# Altium PCB PCB2.PcbDoc (part 2 of 2)
Units mm, origin at the board's own origin, x right, y up, seen from the top; angles counter-clockwise.
Board outline 247 x 102 mm, 2 copper layers (Top Layer, Bottom Layer); 194 components, 192 nets, 825 pads, 179 vias.
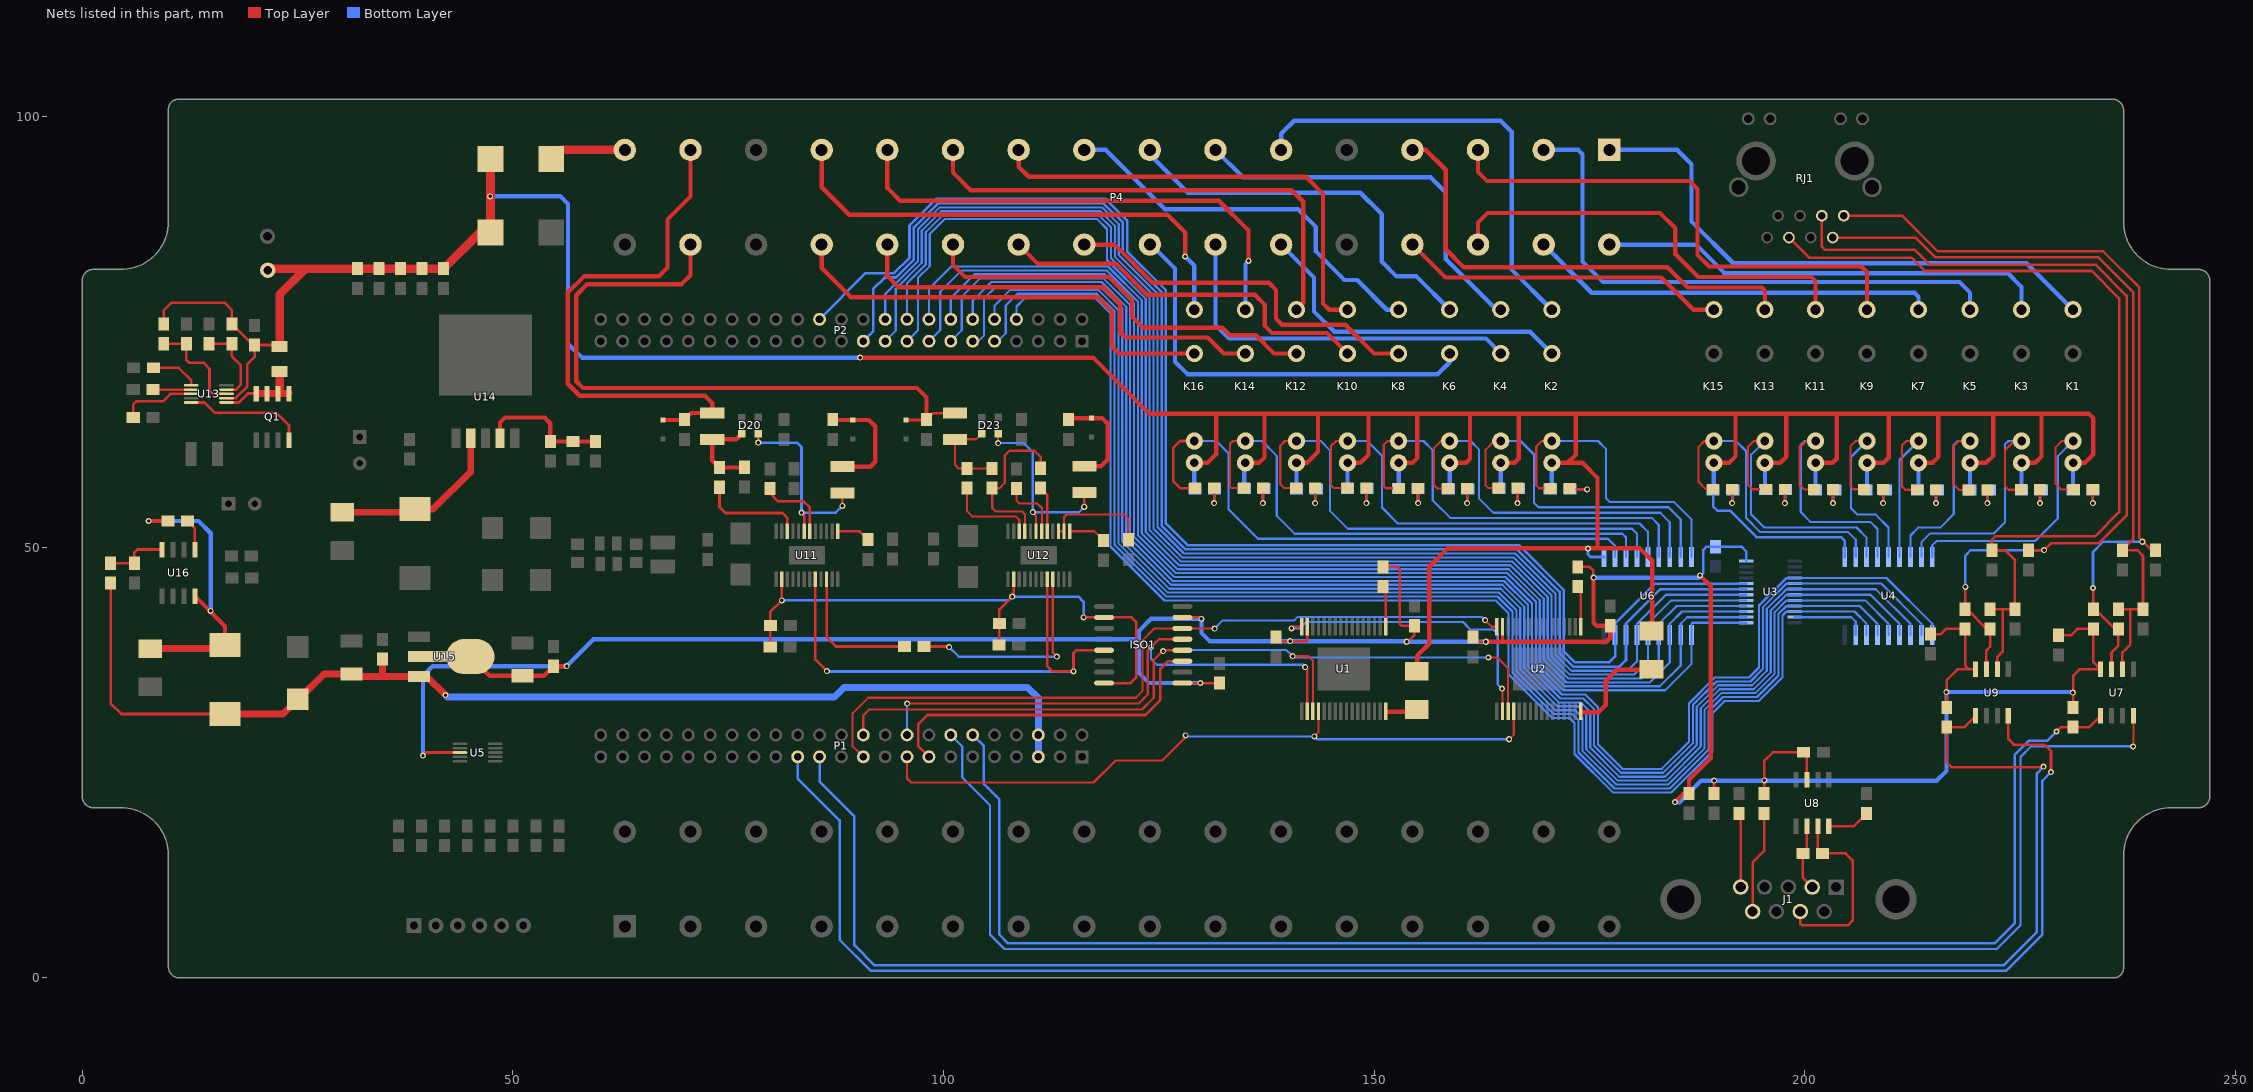
[diagram p2: the nets of this part, all layers, seen from the top]

## Via types
v1: diameter 0.7, hole 0.4, Top Layer to Bottom Layer, 179 vias

## Nets (pads, with @x,y where several pads share a name; then routed paths per layer and width w, separated by ;. In a path a pad name is that pad's centre, name@x,y a point inside that pad or via, vN(x,y) a via of type N, cw(c..) or ccw(c..) an arc to the next point about the centre after c; other vN are vias at no path point) (continued)
NetC25_1: C25.1 U11.18 | length 8.6
  Top Layer w0.3: C25.1@79.82,56.8 79.82,56.27 80.78,55.31 83.735,55.31 84.465,54.58 U11.18@84.465,51.846
NetC26_1: C26.1 D22.1 R40.2 | length 13.4
  Top Layer w0.5: C26.1@87.13,64.81 87.17,64.77 D22.1@89.45,64.77 91.32,64.77 92.06,64.03 92.06,59.92 91.484,59.344 R40.2@88.25,59.344
NetC33_1: C33.1 R42.1 U12.21 | length 19.3
  Top Layer w0.254: U12.21@109.435,51.846 109.435,53.825 109.12,54.14 106.04,54.14 105.64,54.54 R42.1@105.64,56.85 106.49,56.85 107.11,57.47 107.11,60.65 107.65,61.19 110.55,61.19 111.27,60.47 C33.1@111.27,59.17
NetC33_2: C33.2 U12.17 | length 5.4
  Top Layer w0.254: C33.2@111.27,56.884 112.036,56.118 U12.17@112.036,51.846
NetC35_1: C35.1 U12.14 U12.15 | length 12.5
  Top Layer w0.254: U12.15@113.336,51.846 U12.14@113.986,51.846 113.986,53.496 114.28,53.79 120.96,53.79 121.46,53.29 C35.1@121.46,50.86
NetC36_1: C36.1 U12.18 | length 7.4
  Top Layer w0.254: C36.1@108.48,56.8 108.48,55.39 108.81,55.06 110.91,55.06 111.417,54.553 111.417,51.878 U12.18@111.385,51.846
NetC37_1: C37.1 D25.1 R44.2 | length 12.1
  Top Layer w0.5: C37.1@114.52,64.81 114.696,64.986 D25.1@117.18,64.986 118.404,64.986 119.07,64.32 119.07,60.19 118.274,59.394 R44.2@116.34,59.394
NetC45_1: C45.1 U13.6 | length 5.6
  Top Layer w0.3: C45.1@8.25,70.83 11.2,70.83 12.64,69.39 U13.6@12.64,68.8
NetC46_1: C46.1 R52.1 R53.2 U14.4 | length 15.5
  Top Layer w0.5: U14.4@48.505,62.639 48.505,64.485 49.08,65.06 53.68,65.06 54.34,64.4 R53.2@54.34,62.276 R52.1@59.57,62.276
NetC56_1: C56.1 U16.1 | length 3.7
  Top Layer w0.3: C56.1@12.22,53.04 13.076,52.184 U16.1@13.076,49.73
NetC56_2: C56.2 D29.2 L4.1 U16.8 | length 35.2
  Top Layer w0.5: v1(7.71,53.04) C56.2@9.934,53.04 ; U16.8@13.076,44.33 16.58,40.826 L4.1@16.58,38.63
  Top Layer w0.8: D29.2@7.7,38.24 16.19,38.24 L4.1@16.58,38.63
  Bottom Layer w0.5: v1(7.71,53.04) 13.49,53.04 14.91,51.62 v1(14.91,42.6)
NetD1_2: D1.2 U1.16 | length 3.5
  Top Layer w0.5: U1.16@151.51,30.9 D1.2@155,30.9
NetD2_2: D2.2 U2.16 | length 11.8
  Top Layer w0.5: 174.2,30.83 176.05,30.83 176.88,31.66 176.88,34.47 178.17,35.76 D2.2@182.28,35.76
NetD3_1: D3.1 R4.2 | length 4
  Top Layer w0.3: D3.1@172.673,56.837 172.8,56.71 v1(174.71,56.71)
  Bottom Layer w0.3: R4.2@172.786,56.71 v1(174.71,56.71)
NetD4_1: D4.1 R3.2 | length 3.1
  Top Layer w0.3: v1(233.423,55.107) D4.1@233.423,56.697
  Bottom Layer w0.3: v1(233.423,55.107) R3.2@233.423,56.617
NetD5_1: D5.1 R5.2 | length 3
  Top Layer w0.3: v1(227.293,55.107) D5.1@227.293,56.677
  Bottom Layer w0.3: v1(227.293,55.107) R5.2@227.293,56.497
NetD6_1: D6.1 R6.2 | length 4.8
  Top Layer w0.3: v1(166.63,55.107) 166.63,56.844 D6.1@166.643,56.857 166.643,55.617
  Bottom Layer w0.3: v1(166.63,55.107) 166.63,56.684 R6.2@166.756,56.81
NetD7_1: D7.1 R7.2 | length 3
  Top Layer w0.3: v1(221.18,55.107) 221.18,56.634 D7.1@221.193,56.647 ; v1@221.193,54.927 v1@221.193,55.107
  Bottom Layer w0.3: v1(221.18,55.107) R7.2@221.18,56.384
NetD8_1: D8.1 R8.1 | length 3.4
  Top Layer w0.3: D8.1@160.773,56.817 160.78,56.81 v1(160.78,55.107)
  Bottom Layer w0.3: v1(160.78,55.107) 160.78,56.64 R8.1@160.88,56.74
NetD9_1: D9.1 R9.2 | length 2.9
  Top Layer w0.3: v1(215.223,55.107) D9.1@215.223,56.667
  Bottom Layer w0.3: v1(215.223,55.107) R9.2@215.223,56.487
NetD10_1: D10.1 R10.1 | length 3.4
  Top Layer w0.3: v1(155.083,55.107) D10.1@155.083,56.837
  Bottom Layer w0.3: v1(155.083,55.107) 155.083,56.773 R10.1@155.1,56.79
NetD11_1: D11.1 R11.2 | length 3.3
  Top Layer w0.3: v1(209.093,55.107) D11.1@209.093,56.717
  Bottom Layer w0.3: v1(209.093,55.107) 209.093,56.357 R11.2@209.376,56.64
NetD12_1: D12.1 R12.1 | length 3.5
  Top Layer w0.3: v1(149.083,55.107) D12.1@149.083,56.857
  Bottom Layer w0.3: v1(149.083,55.107) 149.083,56.713 R12.1@149.16,56.79
NetD13_1: D13.1 R13.2 | length 3.2
  Top Layer w0.3: v1(203.26,55.107) 203.26,56.694 D13.1@203.263,56.697
  Bottom Layer w0.3: v1(203.26,55.107) 203.26,56.394 R13.2@203.506,56.64
NetD14_1: D14.1 R14.1 | length 4.6
  Top Layer w0.3: 143.133,55.737 D14.1@143.133,56.857 143.14,56.85 v1(143.14,55.107)
  Bottom Layer w0.3: v1(143.14,55.107) 143.14,56.65 R14.1@143.27,56.78
NetD15_1: D15.1 R15.2 | length 3.4
  Top Layer w0.3: v1(197.67,55.107) 197.67,56.694 D15.1@197.703,56.727 ; v1@197.703,54.873 v1@197.703,55.107
  Bottom Layer w0.3: v1@197.736,55.173 R15.2@197.736,56.7
NetD16_1: D16.1 R16.1 | length 4.7
  Top Layer w0.3: v1(137.07,55.107) 137.07,56.864 D16.1@137.083,56.877 137.083,55.693
  Bottom Layer w0.3: v1(137.07,55.107) 137.07,56.67 R16.1@137.19,56.79
NetD17_1: D17.1 R17.2 | length 3.1
  Top Layer w0.3: v1(191.543,55.107) D17.1@191.543,56.727
  Bottom Layer w0.3: v1@191.636,55.2 R17.2@191.636,56.65
NetD18_1: D18.1 R18.1 | length 3.4
  Top Layer w0.3: v1(131.42,55.107) 131.42,56.854 D18.1@131.423,56.857
  Bottom Layer w0.3: v1(131.42,55.107) R18.1@131.42,56.72 ; R18.1@131.46,56.72 R18.1@131.46,56.76
NetD20_2: D20.2 FB1.1 R36.2 R37.2 | length 10.3
  Top Layer w0.5: D20.2@76.58,63.18 75.926,62.526 FB1.1@73.14,62.526 73.14,60.09 R36.2@73.98,59.25 76.884,59.25 R37.2@76.91,59.276
NetD20_3: D20.3 R40.1 U11.19 | length 22.8
  Top Layer w0.3: v1(78.48,62.14) D20.3@78.48,63.18 ; v1(83.5,54.02) 83.815,53.705 U11.19@83.815,51.846 ; v1(88.25,54.79) R40.1@88.25,56.296
  Bottom Layer w0.3: v1(78.48,62.14) 82.98,62.14 83.5,61.62 v1(83.5,54.02) 87.48,54.02 v1(88.25,54.79)
NetD23_2: D23.2 FB2.1 R41.2 R42.2 | length 10.8
  Top Layer w0.254: D23.2@104.43,63.18 103.776,62.526 FB2.1@101.32,62.526 101.32,59.56 101.734,59.146 R41.2@102.73,59.146 105.63,59.146 R42.2@105.64,59.136
NetD23_3: D23.3 R44.1 U12.19 | length 22.8
  Top Layer w0.254: v1(106.33,62.08) D23.3@106.33,63.18 ; v1(110.36,54.06) 110.735,53.685 U12.19@110.735,51.846 ; v1(116.33,54.67) 116.33,56.336 R44.1@116.34,56.346
  Bottom Layer w0.254: v1(106.33,62.08) 109.34,62.08 110.36,61.06 v1(110.36,54.06) 115.72,54.06 v1(116.33,54.67)
NetD28_2: D28.2 L2.1 U14.2 | length 20.5
  Top Layer w0.8: D28.2@30.36,54.06 39.63,54.06 39.99,54.42 40.72,54.42 45.105,58.805 U14.2@45.105,62.639
NetJ1_2: J1.2 R24.2 U8.6 | length 7.7
  Top Layer w0.3: U8.6@200.236,17.59 200.236,14.912 R24.2@199.774,14.45 199.774,11.616 J1.2@200.85,10.54
NetJ1_5: J1.5 R26.2 | length 8.6
  Top Layer w0.3: R26.2@192.37,19.1 192.54,18.93 J1.5@192.54,10.54
NetJ1_7: J1.7 R24.1 U8.7 | length 22
  Top Layer w0.3: J1.7@199.465,7.7 199.465,6.305 199.68,6.09 205,6.09 205.55,6.64 205.55,13.64 204.74,14.45 R24.1@202.06,14.45 201.506,15.004 U8.7@201.506,17.59
NetJ1_9: J1.9 R25.1 | length 12
  Top Layer w0.3: J1.9@193.925,7.7 193.925,13.405 195.27,14.75 R25.1@195.27,19.1
NetQ1_4: Q1.4 U13.10 | length 14.2
  Top Layer w0.3: U13.10@12.64,66.8 14.19,66.8 15.39,65.6 22.54,65.6 24.004,64.136 Q1.4@24.004,62.44
NetR1_2: R1.2 U1.17 | length 4.4
  Top Layer w0.3: U1.17@151.33,40.76 R1.2@151.33,45.114
NetR2_2: R2.2 U2.17 | length 4.8
  Top Layer w0.3: R2.2@173.63,45.424 173.99,45.064 U2.17@173.99,40.76
NetR20_1: R20.1 U8.8 | length 5
  Top Layer w0.3: U8.8@202.776,17.59 205.66,17.59 R20.1@207.17,19.1
NetR36_1: R36.1 U11.22 | length 12.3
  Top Layer w0.3: R36.1@73.98,56.964 73.98,54.65 74.66,53.97 81.29,53.97 81.864,53.396 U11.22@81.864,51.846
NetR39_2: R39.2 U11.13 | length 3.9
  Top Layer w0.3: U11.13@87.716,51.846 90.25,51.846 R39.2@91.22,50.876
NetR41_1: R41.1 U12.22 | length 10.5
  Top Layer w0.254: R41.1@102.73,56.86 102.73,54.16 103.31,53.58 108.38,53.58 108.784,53.176 U12.22@108.784,51.846
NetR43_2: R43.2 U12.13 | length 4.4
  Top Layer w0.254: U12.13@114.636,51.846 117.481,51.846 R43.2@118.56,50.767
NetR46_1: R46.1 R49.2 U13.4 | length 9.8
  Top Layer w0.3: R49.2@14.69,73.62 R46.1@17.37,73.62 17.37,72.16 18.39,71.14 18.39,68.84 17.85,68.3 U13.4@16.74,68.3
NetR47_1: R47.1 R50.2 U13.3 | length 12.3
  Top Layer w0.3: R47.1@9.46,73.62 R50.2@12.09,73.62 12.09,71.71 12.38,71.42 14.06,71.42 14.77,70.71 14.77,68.19 15.16,67.8 U13.3@16.74,67.8
NetR48_2: R48.2 U13.8 | length 8.8
  Top Layer w0.3: R48.2@5.914,65.05 5.914,66.564 6.29,66.94 9.38,66.94 10.24,67.8 U13.8@12.64,67.8
NetR51_2: R51.2 U13.7 | length 4.4
  Top Layer w0.3: R51.2@8.196,68.3 U13.7@12.64,68.3
NetR54_1: R54.1 R55.1 U16.4 | length 7.4
  Top Layer w0.3: R54.1@3.29,48.13 R55.1@6.04,48.13 6.04,49.38 6.39,49.73 U16.4@9.266,49.73
NetU1_32: U1.32 U2.2 | length 35.4
  Top Layer w0.254: v1(140.39,40.57) 140.58,40.76 U1.32@141.58,40.76 ; v1(164.83,33.57) 164.89,33.51 U2.2@164.89,30.96
  Bottom Layer w0.254: v1(140.39,40.57) 141.35,40.57 142.09,41.31 160.3,41.31 161.18,40.43 163.82,40.43 164.34,39.91 164.34,34.06 v1(164.83,33.57) v1@164.83,33.48
O5V_ISO: C20.1 C21.1 C31.1 C32.1 ISO1.10 ISO1.16 U11.2 U12.2 | length 70.8
  Top Layer w0.3: C20.1@79.87,38.42 79.87,42.49 v1(81.212,43.832) U11.2@81.212,46.284 ; C31.1@106.212,41.038 106.44,40.81 C32.1@106.44,38.63 ; C31.1@106.48,41.15 106.48,42.79 108.132,44.442 U12.2@108.132,46.284 ; v1(116.27,41.85) 116.275,41.845 ISO1.10@118.63,41.845 121.825,41.845 122.35,41.32 122.35,34.85 121.725,34.225 ISO1.16@118.63,34.225
  Bottom Layer w0.3: v1(81.212,43.832) 107.542,43.832 v1(107.97,44.26) 115.65,44.26 116.27,43.64 v1(116.27,41.85)
OUT_C\S\: ISO1.3 P1.15 | length 40.1
  Top Layer w0.3: P1.15@98.298,25.658 97.07,26.886 97.07,29.48 98.11,30.52 123.42,30.52 125.17,32.27 125.17,35.87 126.065,36.765 ISO1.3@127.73,36.765
OUT_PIN0: K1.1 P4.1 | length 65.4
  Bottom Layer w0.5: P4.1@177.29,96.13 185.18,96.13 186.84,94.47 186.84,87.82 191.69,82.97 225.736,82.97 K1.1@231.134,77.572
OUT_PIN1: K3.1 P4.2 | length 52.5
  Bottom Layer w0.5: P4.2@177.29,85.13 187.34,85.13 190.65,81.82 223.56,81.82 225.155,80.225 K3.1@225.155,77.572
OUT_PIN2: K5.1 P4.3 | length 65.6
  Bottom Layer w0.5: P4.3@169.67,96.13 173.67,96.13 174.19,95.61 174.19,83.16 176.57,80.78 217.95,80.78 219.176,79.554 K5.1@219.176,77.572
OUT_PIN3: K7.1 P4.4 | length 47.5
  Bottom Layer w0.5: P4.4@169.67,85.13 175.26,79.54 212.72,79.54 213.197,79.063 K7.1@213.197,77.572
OUT_PIN4: K9.1 P4.5 | length 61.4
  Top Layer w0.5: P4.5@162.05,96.13 162.05,93.56 163.09,92.52 186.61,92.52 187.54,91.59 187.54,83.94 188.9,82.58 206.55,82.58 207.219,81.911 K9.1@207.219,77.572
OUT_PIN5: K11.1 P4.6 | length 50.6
  Top Layer w0.5: P4.6@162.05,85.13 162.05,87.69 163.16,88.8 183.18,88.8 184.96,87.02 184.96,84.02 187.61,81.37 200.76,81.37 201.24,80.89 K11.1@201.24,77.572
OUT_PIN6: K13.1 P4.7 | length 55.3
  Top Layer w0.5: P4.7@154.43,96.13 155.98,96.13 158.3,93.81 158.3,84.59 160.38,82.51 184.03,82.51 186.39,80.15 194.98,80.15 195.358,79.772 K13.1@195.358,77.572
OUT_PIN7: K15.1 P4.8 | length 38.1
  Top Layer w0.5: P4.8@154.43,85.13 158.26,81.3 183.33,81.3 187.058,77.572 K15.1@189.429,77.572
OUT_PIN8: K2.1 P4.11 | length 52.4
  Bottom Layer w0.5: P4.11@139.19,96.13 139.19,97.99 140.72,99.52 164.67,99.52 165.95,98.24 165.95,82.241 K2.1@170.619,77.572
OUT_PIN9: K2.2 P4.12 | length 39
  Bottom Layer w0.5: P4.12@139.19,85.13 143.01,81.31 143.01,77.37 145.37,75.01 168.101,75.01 K2.2@170.619,72.492
OUT_PIN10: K4.1 P4.13 | length 45.3
  Bottom Layer w0.5: P4.13@131.57,96.13 134.75,92.95 156.52,92.95 158.3,91.17 158.3,83.45 164.178,77.572 K4.1@164.69,77.572
OUT_PIN11: K4.2 P4.14 | length 43.8
  Bottom Layer w0.5: P4.14@131.57,85.13 131.57,75.8 133.15,74.22 162.962,74.22 K4.2@164.69,72.492
OUT_PIN12: K6.1 P4.15 | length 46.1
  Bottom Layer w0.5: P4.15@123.95,96.13 123.95,95.57 128.36,91.16 148.38,91.16 150.87,88.67 150.87,83.16 152.59,81.44 154.892,81.44 K6.1@158.76,77.572
OUT_PIN13: K6.2 P4.16 | length 49
  Bottom Layer w0.5: P4.16@123.95,85.13 124.09,85.13 126.87,82.35 126.87,71.53 128.31,70.09 157.37,70.09 158.76,71.48 K6.2@158.76,72.492
OUT_PIN14: K8.1 P4.17 | length 45.9
  Bottom Layer w0.5: P4.17@116.33,96.13 118.82,96.13 125.72,89.23 141.16,89.23 143.22,87.17 143.22,84.32 146.53,81.01 148.02,81.01 151.458,77.572 K8.1@152.831,77.572
OUT_PIN15: K8.2 P4.18 | length 43.7
  Top Layer w0.5: P4.18@116.33,85.13 119.83,85.13 124.26,80.7 137.76,80.7 138.6,79.86 138.6,76.52 139.29,75.83 146.63,75.83 149.968,72.492 K8.2@152.831,72.492
OUT_PIN16: K10.1 P4.19 | length 54.5
  Top Layer w0.5: P4.19@108.71,96.13 108.71,94.18 109.89,93 142.06,93 144.05,91.01 144.05,78.29 144.768,77.572 K10.1@146.901,77.572
OUT_PIN17: K10.2 P4.20 | length 44.8
  Top Layer w0.5: P4.20@108.71,85.13 110.92,82.92 120,82.92 123.61,79.31 136.12,79.31 137.27,78.16 137.27,75.73 138.13,74.87 144.523,74.87 K10.2@146.901,72.492
OUT_PIN18: K12.1 P4.21 | length 57.6
  Top Layer w0.5: P4.21@101.09,96.13 101.09,93.5 103.14,91.45 140.41,91.45 141.75,90.11 141.75,78.35 K12.1@140.972,77.572
OUT_PIN19: K12.2 P4.22 | length 47.6
  Top Layer w0.5: P4.22@101.09,85.13 101.09,82.77 102.49,81.37 119.22,81.37 121.88,78.71 121.88,76.77 123.16,75.49 132.36,75.49 133.25,74.6 136.27,74.6 138.378,72.492 K12.2@140.972,72.492
OUT_PIN20: K14.1 P4.23 | length 57.8
  Top Layer w0.5: P4.23@93.47,96.13 93.47,91.69 94.93,90.23 131.95,90.23 135.4,86.78 v1(135.4,83.23)
  Bottom Layer w0.5: K14.1@135.042,77.572 135.042,82.872 v1(135.4,83.23)
OUT_PIN21: K14.2 P4.24 | length 50.9
  Top Layer w0.5: P4.24@93.47,85.13 93.47,81.49 94.77,80.19 118.58,80.19 120.52,78.25 120.52,74.95 121.12,74.35 130.66,74.35 132.518,72.492 K14.2@135.042,72.492
OUT_PIN22: K16.1 P4.25 | length 58.1
  Top Layer w0.5: P4.25@85.85,96.13 85.85,91.79 89.05,88.59 125.98,88.59 128.05,86.52 v1(128.05,83.75)
  Bottom Layer w0.5: v1(128.05,83.75) 129.113,82.687 K16.1@129.113,77.572
OUT_PIN23: K16.2 P4.26 | length 52.5
  Top Layer w0.5: P4.26@85.85,85.13 85.85,82.4 89.22,79.03 117.89,79.03 119.56,77.36 119.56,73.28 120.348,72.492 K16.2@129.113,72.492
OUT_SIG0: D4.2 K1.3 U4.18 | length 35.9
  Top Layer w0.254: K1.3@231.134,62.332 229.832,62.332 229.11,61.61 229.11,57.35 229.763,56.697 D4.2@231.213,56.697
  Bottom Layer w0.254: U4.18@214.79,48.861 214.79,50.21 215.3,50.72 226.75,50.72 229.36,53.33 229.36,60.558 K1.3@231.134,62.332
OUT_SIG1: D5.2 K3.3 U4.17 | length 32.1
  Top Layer w0.254: D5.2@225.083,56.677 223.643,56.677 223.24,57.08 223.24,61.26 224.312,62.332 K3.3@225.155,62.332
  Bottom Layer w0.254: U4.17@213.52,48.861 213.52,50.58 214.54,51.6 221.95,51.6 223.24,52.89 223.24,61.94 223.632,62.332 K3.3@225.155,62.332
OUT_SIG2: D7.2 K5.3 U4.16 | length 27.3
  Top Layer w0.254: D7.2@218.983,56.647 217.933,56.647 217.22,57.36 217.22,61.68 217.872,62.332 K5.3@219.176,62.332
  Bottom Layer w0.254: U4.16@212.25,48.861 212.25,51.35 213.17,52.27 215.7,52.27 217.29,53.86 217.29,61.89 217.732,62.332 K5.3@219.176,62.332
OUT_SIG3: D9.2 K7.3 U4.15 | length 23.2
  Top Layer w0.254: D9.2@213.013,56.667 211.653,56.667 211.28,57.04 211.28,61.82 211.792,62.332 K7.3@213.197,62.332
  Bottom Layer w0.254: U4.15@210.98,48.861 210.98,60.115 K7.3@213.197,62.332
OUT_SIG4: D11.2 K9.3 U4.14 | length 25.9
  Top Layer w0.254: D11.2@206.883,56.717 205.643,56.717 205.28,57.08 205.28,61.71 205.902,62.332 K9.3@207.219,62.332
  Bottom Layer w0.254: K9.3@207.219,62.332 205.36,60.473 205.36,54.52 206.1,53.78 208.22,53.78 209.71,52.29 U4.14@209.71,48.861
OUT_SIG5: D13.2 K11.3 U4.13 | length 31.1
  Top Layer w0.254: D13.2@201.053,56.697 199.933,56.697 199.38,57.25 199.38,61.57 200.142,62.332 K11.3@201.24,62.332
  Bottom Layer w0.254: K11.3@201.24,62.332 199.972,62.332 199.52,61.88 199.52,54.08 200.69,52.91 207.63,52.91 208.44,52.1 U4.13@208.44,48.861
OUT_SIG6: D15.2 K13.3 U4.12 | length 34.9
  Top Layer w0.254: K13.3@195.358,62.332 194.052,62.332 193.41,61.69 193.41,57.23 193.913,56.727 D15.2@195.493,56.727
  Bottom Layer w0.254: K13.3@195.358,62.332 193.76,60.734 193.76,53.79 195.27,52.28 205.99,52.28 207.17,51.1 U4.12@207.17,48.861
OUT_SIG7: D17.2 K15.3 U4.11 | length 35.9
  Top Layer w0.254: D17.2@189.333,56.727 188.503,56.727 187.66,57.57 187.66,61.65 188.342,62.332 K15.3@189.429,62.332
  Bottom Layer w0.254: K15.3@189.429,62.332 191.988,62.332 193.16,61.16 193.16,53.42 194.83,51.75 205.02,51.75 205.9,50.87 U4.11@205.9,48.861
OUT_SIG8: D3.2 K2.3 U6.18 | length 36.1
  Top Layer w0.254: D3.2@170.463,56.837 169.153,56.837 168.81,57.18 168.81,61.7 169.442,62.332 K2.3@170.619,62.332
  Bottom Layer w0.254: K2.3@170.619,62.332 175.988,62.332 176.89,61.43 176.89,55.71 177.37,55.23 184.82,55.23 186.85,53.2 U6.18@186.85,48.861
OUT_SIG9: D6.2 K4.3 U6.17 | length 40.3
  Top Layer w0.254: D6.2@164.433,56.857 163.253,56.857 162.93,57.18 162.93,61.32 163.942,62.332 K4.3@164.69,62.332
  Bottom Layer w0.254: K4.3@164.69,62.332 166.978,62.332 168.55,60.76 168.55,55.16 169.07,54.64 184.16,54.64 185.58,53.22 U6.17@185.58,48.861
OUT_SIG10: D8.2 K6.3 U6.16 | length 45.1
  Top Layer w0.254: D8.2@158.563,56.817 157.333,56.817 156.92,57.23 156.92,61.47 157.782,62.332 K6.3@158.76,62.332
  Bottom Layer w0.254: K6.3@158.76,62.332 161.168,62.332 162.18,61.32 162.18,55.64 163.83,53.99 183.21,53.99 184.31,52.89 U6.16@184.31,48.861
OUT_SIG11: D10.2 K8.3 U6.15 | length 50
  Top Layer w0.254: K8.3@152.831,62.332 151.552,62.332 151.11,61.89 151.11,57.1 151.373,56.837 D10.2@152.873,56.837
  Bottom Layer w0.254: K8.3@152.831,62.332 155.728,62.332 156.8,61.26 156.8,55.41 158.81,53.4 182.21,53.4 183.04,52.57 U6.15@183.04,48.861
OUT_SIG12: D12.2 K10.3 U6.14 | length 54.4
  Top Layer w0.254: D12.2@146.873,56.857 145.333,56.857 144.99,57.2 144.99,61.75 145.572,62.332 K10.3@146.901,62.332
  Bottom Layer w0.254: K10.3@146.901,62.332 149.178,62.332 150.9,60.61 150.9,54.6 152.74,52.76 180.8,52.76 181.77,51.79 U6.14@181.77,48.861
OUT_SIG13: D14.2 K12.3 U6.13 | length 59.4
  Top Layer w0.254: D14.2@140.923,56.857 139.563,56.857 139.08,57.34 139.08,61.78 139.632,62.332 K12.3@140.972,62.332
  Bottom Layer w0.254: K12.3@140.972,62.332 143.788,62.332 144.85,61.27 144.85,54.22 146.94,52.13 179.92,52.13 180.5,51.55 U6.13@180.5,48.861
OUT_SIG14: D16.2 K14.3 U6.12 | length 63.8
  Top Layer w0.254: D16.2@134.873,56.877 133.413,56.877 133.24,57.05 133.24,61.97 133.602,62.332 K14.3@135.042,62.332
  Bottom Layer w0.254: K14.3@135.042,62.332 136.958,62.332 138.69,60.6 138.69,53.64 140.78,51.55 178.81,51.55 179.23,51.13 U6.12@179.23,48.861
OUT_SIG15: D18.2 K16.3 U6.11 | length 68.5
  Top Layer w0.3: K16.3@129.113,62.332 127.472,62.332 126.65,61.51 126.65,57.68 127.473,56.857 D18.2@129.213,56.857
  Bottom Layer w0.254: K16.3@129.113,62.332 131.648,62.332 133.08,60.9 133.08,54.4 136.5,50.98 177.14,50.98 177.96,50.16 U6.11@177.96,48.861
PA0: P2.14 U3.4 U4.1 | length 183.4
  Bottom Layer w0.254: P2.14@100.838,76.454 100.838,78.928 103.597,81.687 118.717,81.687 122.108,78.296 122.108,51.206 126.776,46.538 165.246,46.538 168.318,43.466 168.318,36.376 171.806,32.888 174.502,32.888 175.98,31.41 175.98,27.11 178.832,24.258 183.384,24.258 186.54,27.414 186.54,31.86 189.55,34.87 193.5,34.87 194.67,36.04 194.67,43.236 197.859,46.425 U3.4@198.829,46.425 209.472,46.425 214.79,41.107 U4.1@214.79,39.819
PA1: P2.13 U3.5 U4.2 | length 183.4
  Bottom Layer w0.254: P2.13@100.838,73.914 102.11,75.186 102.11,79.08 104.263,81.233 118.529,81.233 121.654,78.108 121.654,51.018 126.588,46.084 165.058,46.084 167.864,43.278 167.864,36.188 171.618,32.434 174.281,32.434 175.526,31.189 175.526,26.922 178.644,23.804 183.572,23.804 186.994,27.226 186.994,31.672 189.738,34.416 193.688,34.416 195.124,35.852 195.124,43.04 197.859,45.775 U3.5@198.829,45.775 208.852,45.775 213.52,41.107 U4.2@213.52,39.819
PA2: P2.12 U3.6 U4.3 | length 177
  Bottom Layer w0.254: P2.12@103.378,76.454 103.378,78.628 105.529,80.779 118.341,80.779 121.2,77.92 121.2,50.83 126.4,45.63 164.87,45.63 167.41,43.09 167.41,36 171.43,31.98 173.96,31.98 175.072,30.868 175.072,26.734 178.456,23.35 183.76,23.35 187.448,27.038 187.448,31.484 189.926,33.962 193.876,33.962 195.578,35.664 195.578,42.844 197.859,45.125 U3.6@198.829,45.125 208.232,45.125 212.25,41.107 U4.3@212.25,39.819
PA3: P2.11 U3.7 U4.4 | length 177.3
  Bottom Layer w0.254: P2.11@103.378,73.914 104.034,73.914 104.68,74.56 104.68,78.84 106.165,80.325 118.153,80.325 120.746,77.732 120.746,50.642 126.212,45.176 164.682,45.176 166.956,42.902 166.956,35.812 171.242,31.526 173.639,31.526 174.618,30.547 174.618,26.546 178.268,22.896 183.948,22.896 187.902,26.85 187.902,31.296 190.114,33.508 194.064,33.508 196.032,35.476 196.032,42.648 197.859,44.475 U3.7@198.829,44.475 207.612,44.475 210.98,41.107 U4.4@210.98,39.819
PA4: P2.10 U3.8 U4.5 | length 170.3
  Bottom Layer w0.254: P2.10@105.918,76.454 105.918,78.048 107.741,79.871 117.965,79.871 120.292,77.544 120.292,50.454 126.024,44.722 164.494,44.722 166.502,42.714 166.502,35.624 171.054,31.072 173.318,31.072 174.164,30.226 174.164,26.358 178.08,22.442 184.136,22.442 188.356,26.662 188.356,31.108 190.302,33.054 194.252,33.054 196.486,35.288 196.486,42.452 197.859,43.825 U3.8@198.829,43.825 206.992,43.825 209.71,41.107 U4.5@209.71,39.819
PA5: P2.9 U3.9 U4.6 | length 170.4
  Bottom Layer w0.254: P2.9@105.918,73.914 106.294,73.914 107.22,74.84 107.22,78.07 108.567,79.417 117.777,79.417 119.838,77.356 119.838,50.266 125.836,44.268 164.306,44.268 166.048,42.526 166.048,35.436 170.866,30.618 172.997,30.618 173.71,29.905 173.71,26.17 177.892,21.988 184.324,21.988 188.81,26.474 188.81,30.92 190.49,32.6 194.44,32.6 196.94,35.1 196.94,42.256 197.859,43.175 U3.9@198.829,43.175 206.372,43.175 208.44,41.107 U4.6@208.44,39.819
PA6: P2.8 U3.10 U4.7 | length 163.9
  Bottom Layer w0.254: P2.8@108.458,76.454 108.458,77.948 109.473,78.963 117.589,78.963 119.384,77.168 119.384,50.078 125.648,43.814 164.118,43.814 165.594,42.338 165.594,35.248 170.678,30.164 172.676,30.164 173.256,29.584 173.256,25.982 177.704,21.534 184.512,21.534 189.264,26.286 189.264,30.732 190.678,32.146 194.628,32.146 197.394,34.912 197.394,42.06 197.859,42.525 U3.10@198.829,42.525 205.752,42.525 207.17,41.107 U4.7@207.17,39.819
PA7: U3.11 U4.8 | length 8.8
  Bottom Layer w0.254: U3.11@198.829,41.875 205.375,41.875 205.9,41.35 U4.8@205.9,39.819
PB0: P2.15 U3.13 U6.1 | length 147.1
  Bottom Layer w0.254: P2.15@98.298,73.914 99.61,75.226 99.61,79.65 102.101,82.141 118.905,82.141 122.562,78.484 122.562,51.394 126.964,46.992 165.434,46.992 168.772,43.654 168.772,36.564 171.946,33.39 183.77,33.39 186.85,36.47 U6.1@186.85,39.819 186.85,41.107 186.968,41.225 U3.13@193.191,41.225
PB1: P2.16 U3.14 U6.2 | length 145.9
  Bottom Layer w0.254: P2.16@98.298,76.454 98.298,80.02 100.873,82.595 119.093,82.595 123.016,78.672 123.016,51.582 127.152,47.446 165.622,47.446 169.226,43.842 169.226,36.752 172.134,33.844 183.164,33.844 185.58,36.26 U6.2@185.58,39.819 185.58,41.107 186.348,41.875 U3.14@193.191,41.875
PB2: P2.17 U3.15 U6.3 | length 159.5
  Bottom Layer w0.254: P2.17@95.758,73.914 97.03,75.186 97.03,81.279 98.382,82.631 98.382,86.366 100.106,88.09 117.83,88.09 118.98,86.94 118.98,83.351 123.47,78.861 123.47,51.771 127.341,47.9 165.811,47.9 169.68,44.031 169.68,36.941 172.323,34.298 181.988,34.298 184.31,36.62 U6.3@184.31,39.819 184.31,41.107 185.728,42.525 U3.15@193.191,42.525
PB3: P2.18 U3.16 U6.4 | length 157.5
  Bottom Layer w0.254: P2.18@95.72,76.492 P2.18@95.758,76.454 95.758,80.649 97.928,82.819 97.928,86.554 99.918,88.544 118.018,88.544 119.434,87.128 119.434,83.539 123.924,79.049 123.924,51.959 127.529,48.354 165.999,48.354 170.134,44.219 170.134,37.129 172.511,34.752 180.962,34.752 183.04,36.83 U6.4@183.04,39.819 183.04,41.107 185.108,43.175 U3.16@193.191,43.175
PB4: P2.19 U3.17 U6.5 | length 161.7
  Bottom Layer w0.254: P2.19@93.218,73.914 94.45,75.146 94.45,79.983 97.474,83.007 97.474,86.742 99.73,88.998 118.206,88.998 119.888,87.316 119.888,83.727 124.378,79.237 124.378,52.147 127.717,48.808 166.187,48.808 170.588,44.407 170.588,37.317 172.699,35.206 180.156,35.206 181.77,36.82 U6.5@181.77,39.819 181.77,41.107 184.488,43.825 U3.17@193.191,43.825
PB5: P2.20 U3.18 U6.6 | length 159.9
  Bottom Layer w0.254: P2.20@93.218,76.454 93.218,79.393 97.02,83.195 97.02,86.93 99.542,89.452 118.394,89.452 120.342,87.504 120.342,83.915 124.832,79.425 124.832,52.335 127.905,49.262 166.375,49.262 171.042,44.595 171.042,37.505 172.887,35.66 179.41,35.66 180.5,36.75 U6.6@180.5,39.819 180.5,41.107 183.868,44.475 U3.18@193.191,44.475
PB6: P2.21 U3.19 U6.7 | length 164.8
  Bottom Layer w0.3: P2.21@90.678,73.914 91.82,75.056 91.82,79.95 93.18,81.31 94.46,81.31 96.543,83.393 96.543,87.128 99.344,89.929 118.592,89.929 120.819,87.702 120.819,84.112 125.309,79.622 125.309,52.532 128.102,49.739 166.572,49.739 171.519,44.792 171.519,37.702 173.084,36.137 178.49,36.137 179.23,36.877 U6.7@179.23,39.819 179.23,41.127 183.228,45.125 U3.19@193.191,45.125
PB7: P2.26 U3.20 U6.8 | length 166
  Bottom Layer w0.3: P2.26@85.598,76.454 90.954,81.81 94.253,81.81 96.043,83.6 96.043,87.335 99.137,90.429 118.799,90.429 121.319,87.909 121.319,84.319 125.809,79.829 125.809,52.739 128.309,50.239 166.779,50.239 172.019,44.999 172.019,37.909 173.291,36.637 177.27,36.637 177.96,37.327 U6.8@177.96,39.819 177.96,41.127 182.608,45.775 U3.20@193.191,45.775
RS485A1: C9.2 R22.1 R23.1 RJ1.2 U7.6 | length 87
  Top Layer w0.3: RJ1.2@203.23,85.95 212.83,85.95 215.11,83.67 234.05,83.67 238.12,79.6 238.12,50.876 C9.2@236.89,49.646 238.594,49.646 239.25,48.99 R23.1@239.25,42.8 237.75,42.8 ; R22.1@236.4,42.8 237.75,42.8 ; U7.6@236.864,35.81 236.864,37.774 237.75,38.66 237.75,42.8
RS485A2: C12.2 R29.1 R30.1 RJ1.6 U9.6 | length 102.5
  Top Layer w0.3: RJ1.6@198.15,85.95 200.48,83.62 212.38,83.62 213.93,82.07 233.32,82.07 236.49,78.9 236.49,54.06 233.72,51.29 222.14,51.29 221.7,50.85 C12.2@221.7,49.646 223.244,49.646 224.38,48.51 R30.1@224.38,42.8 222.84,42.8 ; R29.1@221.5,42.8 222.84,42.8 ; U9.6@222.344,35.81 222.344,37.264 222.96,37.88 222.96,42.68 222.84,42.8
RS485B1: C8.2 R21.1 R22.2 RJ1.1 U7.7 | length 91.3
  Top Layer w0.3: RJ1.1@204.51,88.49 211.29,88.49 215.42,84.36 234.61,84.36 238.83,80.14 238.83,51.086 C8.2@240.71,49.206 ; v1(233.45,45.26) 233.49,45.22 R21.1@233.49,42.8 233.7,42.8 235.986,40.514 R22.2@236.4,40.514 236.4,38.58 235.594,37.774 U7.7@235.594,35.81
  Bottom Layer w0.3: v1(233.45,45.26) 233.45,49.44 234.64,50.63 v1(239.18,50.63)
RS485B2: C11.2 R28.1 R29.2 RJ1.3 U9.7 | length 104.3
  Top Layer w0.3: RJ1.3@201.97,88.49 201.97,84.91 202.36,84.52 212.76,84.52 214.48,82.8 233.74,82.8 237.35,79.19 237.35,53.7 234.13,50.48 228.62,50.48 v1(227.786,49.646) C11.2@225.96,49.646 ; v1(218.63,45.4) 218.6,45.37 R28.1@218.6,42.8 218.8,42.8 221.086,40.514 R29.2@221.5,40.514 221.5,38.44 221.074,38.014 U9.7@221.074,35.81
  Bottom Layer w0.3: v1(218.63,45.4) 218.63,49.02 219.256,49.646 v1(227.786,49.646)
SCLK_AO: ISO1.13 U11.8 U12.8 | length 58.8
  Top Layer w0.3: U11.8@85.113,46.284 85.113,36.947 86.44,35.62 v1(86.45,35.62) ; U12.8@112.033,46.284 112.033,36.197 112.64,35.59 v1@114.86,35.59 ; v1(115.08,35.59) 115.08,37.7 115.415,38.035 ISO1.13@118.63,38.035
  Bottom Layer w0.3: v1@86.45,35.57 115.06,35.57 v1(115.08,35.59)
SDI2: R38.1 U12.9 | length 24.9
  Top Layer w0.3: R38.1@97.73,38.47 v1@100.52,38.47 ; U12.9@112.683,46.284 112.683,37.747 v1(113.14,37.29)
  Bottom Layer w0.3: v1(100.65,38.4) 101.76,37.29 v1(113.14,37.29)
SDO1: R38.2 U11.10 | length 16.2
  Top Layer w0.3: U11.10@86.413,46.284 86.413,39.547 87.49,38.47 R38.2@95.444,38.47
SPI0_CS0: P1.17 U1.4 U2.4 | length 81.8
  Top Layer w0.254: P1.17@95.758,25.658 95.758,23.142 96.23,22.67 117.41,22.67 119.98,25.24 125.37,25.24 v1@128.195,28.065 ; v1(143.04,28.03) 143.53,28.52 U1.4@143.53,30.96 ; v1(165.67,27.7) 166.19,28.22 U2.4@166.19,30.96
  Bottom Layer w0.254: v1(128.1,28.16) 128.23,28.03 v1(143.04,28.03) 143.37,27.7 v1(165.67,27.7)
SPI0_MISO: ISO1.6 P1.21 U2.32 | length 88.9
  Top Layer w0.254: P1.21@90.678,25.658 89.44,26.896 89.44,30.72 91.24,32.52 122.31,32.52 123.11,33.32 123.11,39.198 124.487,40.575 ISO1.6@127.73,40.575 v1@131.425,40.575 ; v1(162.87,41.53) 163.64,40.76 U2.32@164.24,40.76
  Bottom Layer w0.254: v1(131.46,40.54) 132.423,41.503 140.723,41.503 141.13,41.91 162.49,41.91 v1(162.87,41.53)
SPI0_MOSI: ISO1.5 P1.18 U1.2 | length 66.5
  Top Layer w0.254: v1@95.79,31.85 122.65,31.85 123.704,32.904 123.704,37.996 v1(124.088,38.38) 125.013,39.305 ISO1.5@127.73,39.305 ; v1(141.98,36.08) 142.23,35.83 U1.2@142.23,30.96
  Bottom Layer w0.254: P1.18@95.758,28.198 95.758,31.818 v1(95.77,31.83) ; v1(124.088,38.38) 124.088,37.032 124.76,36.36 141.7,36.36 v1(141.98,36.08)
SPI0_SCLK: ISO1.4 P1.22 U1.3 U2.3 | length 99.4
  Top Layer w0.254: P1.22@90.678,28.198 90.678,30.468 91.358,31.148 123.028,31.148 124.4,32.52 124.4,36.896 125.539,38.035 ISO1.4@127.73,38.035 ; v1(140.53,37.34) 142.34,37.34 142.88,36.8 U1.3@142.88,30.96 ; v1(163.24,37.19) 164.29,37.19 165.54,35.94 U2.3@165.54,30.96
  Bottom Layer w0.254: v1(125.48,37.93) 125.62,38.07 139.8,38.07 v1(140.53,37.34) 140.68,37.19 v1(163.24,37.19)
UART3_RX: P1.12 R19.1 U7.1 | length 175.1
  Top Layer w0.3: v1(229.21,28.6) 229.72,29.11 R19.1@231.14,29.11 233.024,29.11 U7.1@234.324,30.41
  Bottom Layer w0.3: P1.12@103.378,28.198 104.67,26.906 104.67,22.51 106.44,20.74 106.44,5.06 107.497,4.003 222.013,4.003 224.378,6.368 224.378,25.904 226.016,27.542 228.152,27.542 v1(229.21,28.6)
UART3_TX: P1.14 U7.4 | length 183.1
  Top Layer w0.254: v1(238.12,26.86) 238.134,26.874 U7.4@238.134,30.41
  Bottom Layer w0.254: P1.14@100.838,28.198 102.17,26.866 102.17,23.27 105.39,20.05 105.39,5.03 107.079,3.341 222.287,3.341 225.04,6.094 225.04,25.63 226.29,26.88 v1@238,26.88
UART4_RX: P1.25 R27.1 U9.1 | length 202.4
  Top Layer w0.3: U9.1@219.804,30.41 218.504,29.11 R27.1@216.47,29.11 216.47,25.01 217.02,24.46 227.645,24.46 v1(227.705,24.52)
  Bottom Layer w0.3: P1.25@85.598,25.658 85.598,22.782 89.65,18.73 89.65,3.801 92.002,1.449 223.071,1.449 226.933,5.31 226.933,23.748 v1(227.705,24.52)
UART4_TX: P1.27 U9.4 | length 196
  Top Layer w0.3: U9.4@223.614,30.41 223.614,27.73 224.274,27.07 227.82,27.07 228.57,26.32 v1(228.57,23.88)
  Bottom Layer w0.3: P1.27@83.058,25.658 83.058,23.152 87.94,18.27 87.94,4.422 91.552,0.81 223.336,0.81 227.571,5.046 227.571,22.881 v1(228.57,23.88)
V3_3D: C1.2 C2.2 C3.2 C4.2 C5.2 C7.1 C10.1 C13.1 C30.1 C60.1 CA1.1 ISO1.1 ISO1.7 R1.1 R2.1 R19.2 R21.2 R25.2 R27.2 R28.2 R31.1 R32.1 U1.31 U2.31 U3.24 U5.8 U7.8 U8.3 U9.8 U15.2 | length 374.5
  Top Layer w0.3: v1(39.56,25.81) 39.91,26.16 U5.8@43.85,26.16 ; ISO1.1@127.73,34.225 132.035,34.225 C30.1@132.04,34.22 ; ISO1.7@127.73,41.845 v1@129.775,41.845 ; C1.2@138.57,39.556 139.056,39.07 v1@140.23,39.07 ; v1(140.23,39.09) 142.21,39.09 142.23,39.11 U1.31@142.23,40.76 ; R1.1@151.02,47.71 152.69,47.71 152.98,47.42 152.98,41.03 153.136,40.874 C2.2@154.65,40.874 154.65,39.78 v1@153.94,39.07 ; C3.2@161.45,39.556 161.996,39.01 v1@162.95,39.01 ; 164.89,39.02 U2.31@164.89,40.76 ; R2.1@173.63,47.71 175.01,47.71 175.45,47.27 v1@175.45,46.46 ; R32.1@189.45,21.39 v1@189.45,22.66 ; R25.2@195.27,21.386 195.27,25.16 196.3,26.19 C7.1@199.853,26.19 200.236,25.807 U8.3@200.236,22.99 ; C13.1@214.59,39.91 215.79,39.91 216.394,40.514 R28.2@218.6,40.514 218.6,36.24 219.03,35.81 ; R27.2@216.47,31.396 216.47,34.58 217.7,35.81 219.03,35.81 ; U9.8@219.804,35.81 219.03,35.81 ; C10.1@229.44,39.77 230.9,39.77 231.644,40.514 R21.2@233.49,40.514 233.49,36.644 U7.8@234.324,35.81 231.88,35.81 231.14,35.07 R19.2@231.14,31.396
  Top Layer w0.5: U15.2@45.055,37.3 47.281,35.075 CA1.1@51.095,35.075 53.615,35.075 C60.1@54.72,36.18 54.73,36.19 v1(56.24,36.19) ; v1(162.95,39.02) 164.89,39.02 176.93,39.02 177.4,39.49 C4.2@177.4,40.874 175.806,40.874 175.45,41.23 v1@175.45,46.46 ; v1(184.92,20.39) 185.92,21.39 R31.1@186.54,21.39 186.54,23 189.07,25.53 189.07,45.48 v1(187.82,46.73)
  Bottom Layer w0.3: v1@187.7,46.5 187.74,46.5 188.22,46.98 188.22,49.7 188.576,50.056 C5.2@189.61,50.056 192.654,50.056 193.191,49.519 U3.24@193.191,48.375
  Bottom Layer w0.5: v1(39.56,25.81) 39.56,35.05 40.7,36.19 v1(56.24,36.19) 59.35,39.3 122.67,39.3 ; v1(129.82,34.23) 123.84,34.23 122.67,35.4 122.67,39.3 ; v1(162.95,39.02) v1(153.75,39.02) 153.68,39.09 v1(140.23,39.09) 130.89,39.09 129.94,40.04 v1(129.94,41.68) 124.09,41.68 122.67,40.26 122.67,39.3 ; v1(175.48,46.46) v1@187.7,46.46 ; v1(184.92,20.39) 185.45,20.39 187.96,22.9 v1(189.47,22.9) 215.31,22.9 216.43,24.02 v1(216.43,33.18) 231.04,33.18 v1(231.11,33.11)
  other v1: 195.3,22.92
V24_IN: D26.1 P4.31 | length 9
  Top Layer w1: D26.1@54.445,95.06 55.515,96.13 P4.31@62.99,96.13
VCC24V: C38.2 C39.2 C40.2 C41.2 C42.2 C44.1 D1.1 D2.1 D26.2 D27.2 K1.4 K2.4 K3.4 K4.4 K5.4 K6.4 K7.4 K8.4 K9.4 K10.4 K11.4 K12.4 K13.4 K14.4 K15.4 K16.4 R3.1 R4.1 R5.1 R6.1 R7.1 R8.2 R9.1 R10.2 R11.1 R12.2 R13.1 R14.2 R15.1 R16.2 R17.1 R18.2 R45.1 R46.2 R47.2 TP1.1 U4.10 U6.10 U13.2 | length 534.3
  Top Layer w0.3: R47.2@9.46,75.906 9.46,77.51 10.34,78.39 16.49,78.39 17.37,77.51 R46.2@17.37,75.906 19.806,73.47 C44.1@20.01,73.47 ; U13.2@16.74,67.3 17.797,67.3 19.17,68.673 19.17,71.26 20.01,72.1 C44.1@20.01,73.47 ; R45.1@22.91,73.29 22.73,73.47 C44.1@20.01,73.47
  Top Layer w0.5: v1(90.31,72.01) 117.36,72.01 123.89,65.48 131.64,65.48 ; K16.4@129.113,59.792 130.632,59.792 131.64,60.8 131.64,65.48 ; K14.4@135.042,59.792 136.622,59.792 137.26,60.43 137.26,65.48 ; K12.4@140.972,59.792 142.182,59.792 143.47,61.08 143.47,65.48 ; K10.4@146.901,59.792 148.392,59.792 149.34,60.74 149.34,65.48 ; K8.4@152.831,59.792 154.442,59.792 155.01,60.36 155.01,65.48 ; D1.1@155,35.32 155,37.41 156.38,38.79 156.38,47.72 158.52,49.86 175.92,49.86 ; K6.4@158.76,59.792 160.682,59.792 161.12,60.23 161.12,65.48 ; K4.4@164.69,59.792 166.282,59.792 166.78,60.29 166.78,65.48 ; K2.4@170.619,59.792 172.462,59.792 ; D2.1@182.28,40.18 182.28,48.42 180.84,49.86 175.92,49.86 ; K15.4@189.429,59.792 191.202,59.792 191.95,60.54 191.95,65.48 ; K13.4@195.358,59.792 197.142,59.792 197.85,60.5 197.85,65.48 ; K11.4@201.24,59.792 203.222,59.792 203.69,60.26 203.69,65.48 ; K9.4@207.219,59.792 209.122,59.792 209.73,60.4 209.73,65.48 ; K7.4@213.197,59.792 214.832,59.792 215.5,60.46 215.5,65.48 ; K5.4@219.176,59.792 221.042,59.792 221.88,60.63 221.88,65.2 ; K3.4@225.155,59.792 226.742,59.792 227.48,60.53 227.48,65.48 ; K1.4@231.134,59.792 232.512,59.792 233.47,60.75 233.47,64.99 232.98,65.48 227.48,65.48 ; 131.64,65.48 137.26,65.48 ; 137.26,65.48 143.47,65.48 ; 143.47,65.48 149.34,65.48 ; 149.34,65.48 155.01,65.48 ; 155.01,65.48 161.12,65.48 ; 161.12,65.48 166.78,65.48 ; 166.78,65.48 173.41,65.48 ; 172.462,59.792 173.41,60.74 173.41,65.48 ; 172.462,59.792 174.178,59.792 175.92,58.05 175.92,49.86 ; 173.41,65.48 191.95,65.48 ; 191.95,65.48 197.85,65.48 ; 197.85,65.48 203.69,65.48 ; 203.69,65.48 209.73,65.48 ; 209.73,65.48 215.5,65.48 ; 215.5,65.48 227.48,65.48
  Top Layer w1: TP1.1@21.54,82.16 21.716,82.336 25.906,82.336 ; R45.1@22.91,73.29 22.91,79.34 25.906,82.336 ; D26.2@47.395,95.06 D27.2@47.395,86.52 46.134,86.52 C42.2@41.95,82.336 C41.2@39.455,82.336 C40.2@36.96,82.336 C39.2@34.465,82.336 C38.2@31.97,82.336 25.906,82.336
  Bottom Layer w0.3: v1(174.82,49.85) 174.82,49.15 175.109,48.861 U6.10@176.69,48.861 ; R17.1@189.35,56.65 189.35,54.71 189.825,54.235 191.315,54.235 194.38,51.17 204.17,51.17 204.63,50.71 U4.10@204.63,48.861
  Bottom Layer w0.5: v1(47.34,90.74) 55.51,90.74 56.39,89.86 56.39,73.63 58.01,72.01 v1(90.31,72.01) ; K16.4@129.113,59.792 129.113,56.821 R18.2@129.174,56.76 ; R16.2@134.904,56.79 134.904,59.654 K14.4@135.042,59.792 ; K12.4@140.972,59.792 140.972,56.792 R14.2@140.984,56.78 ; R12.2@146.874,56.79 146.901,56.817 K10.4@146.901,59.792 ; R10.2@152.814,56.79 152.831,56.807 K8.4@152.831,59.792 ; R8.2@158.594,56.74 158.76,56.906 K6.4@158.76,59.792 ; R6.1@164.69,57.03 K4.4@164.69,59.792 ; R4.1@170.619,56.949 K2.4@170.619,59.792 ; R17.1@189.429,56.691 K15.4@189.429,59.792 ; R15.1@195.358,56.792 K13.4@195.358,59.792 ; R13.1@201.24,56.66 K11.4@201.24,59.792 ; R11.1@207.219,56.769 K9.4@207.219,59.792 ; R9.1@213.197,56.747 K7.4@213.197,59.792 ; R7.1@219.176,56.666 K5.4@219.176,59.792 ; R5.1@225.155,56.645 K3.4@225.155,59.792 ; R3.1@231.134,56.666 K1.4@231.134,59.792
VDD_5V: C58.1 C61.1 CA2.1 L4.2 P1.5 P1.6 R54.2 U15.3 | length 135
  Top Layer w0.3: R54.2@3.29,45.844 3.29,31.87 4.53,30.63 L4.2@16.58,30.63
  Top Layer w0.8: L4.2@16.58,30.63 23.305,30.63 C58.1@25.02,32.345 25.115,32.345 28.065,35.295 CA2.1@31.245,35.295 31.538,35.001 U15.3@39.086,35.001 39.989,35.001 v1(42.17,32.82) ; 34.85,35.04 C61.1@34.85,37.01
  Bottom Layer w0.8: v1(42.17,32.82) 42.37,32.62 87.35,32.62 88.46,33.73 109.74,33.73 110.998,32.472 P1.6@110.998,28.198 P1.5@110.998,25.658
VIN_D: Q1.5 Q1.6 Q1.7 Q1.8 R45.2 U13.1 | length 10.1
  Top Layer w0.3: U13.1@16.74,66.8 18.18,66.8 19.22,67.84 Q1.8@20.194,67.84
  Top Layer w0.8: Q1.8@20.194,67.84 Q1.7@21.464,67.84 Q1.6@22.734,67.84 Q1.5@24.004,67.84
  Top Layer w1: Q1.6@22.91,68.016 R45.2@22.91,70.39
VOUT1: C23.1 D21.1 FB1.2 P4.29 | length 63.1
  Top Layer w0.5: D21.1@67.43,64.77 C23.1@70,64.77 ; C23.1@69.94,64.81 70.704,65.574 FB1.2@73.14,65.574 73.14,66.73 72.29,67.58 57.767,67.58 56.37,68.977 56.37,79.553 58.257,81.44 66.92,81.44 67.94,82.46 67.94,88.05 70.61,90.72 P4.29@70.61,96.13
VOUT2: C34.1 D24.1 FB2.2 P4.30 | length 77.7
  Top Layer w0.3: D24.1@95.65,64.77 C34.1@97.97,64.77 ; C34.1@98.01,64.81 98.774,65.574 FB2.2@101.32,65.574
  Top Layer w0.5: P4.30@70.61,85.13 70.61,81.57 69.58,80.54 58.63,80.54 57.35,79.26 57.35,69.27 58.14,68.48 96.9,68.48 98.01,67.37 C34.1@98.01,64.81
pads on no net: J1.1 J1.4 J1.8 J1.10 J1.11 P1.3 P1.4 P1.7 P1.8 P1.9 P1.10 P1.11 P1.13 P1.28 P1.29 P1.30 P1.31 P1.32 P1.33 P1.34 P1.35 P1.36 P1.37 P1.38 P1.39 P1.40 P1.42 P2.3 P2.4 P2.5 P2.6 P2.22 P2.23 P2.24 P2.25 P2.27 P2.28 P2.29 P2.30 P2.31 P2.32 P2.33 P2.34 P2.35 P2.36 P2.37 P2.38 P2.39 P2.40 P2.41 P2.42 P2.43 P2.44 P2.45 P2.46 RJ1. RJ1.4 RJ1.5 RJ1.7 RJ1.8 RJ1.9 RJ1.10 RJ1.11 RJ1.12 U1.0 U1.18 U1.19 U1.20 U1.21 U1.22 U1.23 U1.30 U2.0 U2.18 U2.19 U2.20 U2.21 U2.22 U2.23 U2.30 U3.1 U8.5 U11.3 U11.16 U11.20 U12.3 U12.16 U12.20 U14.0 U16.2 U16.3 U16.5

## Polygon pours and split planes (outlines as drawn)
GND_SIG on Top Layer "Top Layer-No Net 1" (solid, remove dead copper, pour order 9): 35.15,24.67 35.12,24.64 35.12,3.14 57.5,3.14 57.57,3.07 57.55,3.09 57.55,22.13 57.55,28.94 57.44,29.05 57.4,29.09 38.18,29.09 38.18,27.71 35.13,24.66
GND_SIG on Top Layer "Top Layer-No Net 1" (solid, remove dead copper, pour order 11): 61.46,51.43 61.46,71.21 121.81,71.21 121.94,71.08 121.94,33.13 61.34,33.13 61.47,33.26 61.47,51.43
GND_SIG on Top Layer "Top Layer-No Net 1" (solid, pour order 12): 51.277,28.927 51.327,28.927 62.457,40.057 66.187,36.327 66.187,36.177 66.187,36.117 55.107,25.037 51.327,28.817 51.327,28.977
DGND on Top Layer "Top Layer-No Net 1" (solid, remove dead copper, pour order 14): -0.17,102.13 -0.32,101.98 -0.32,-0.17 248.22,-0.17 248.34,-0.29 246.75,1.3 246.75,98.97 246.75,102.15 246.66,102.24 -0.62,102.24
GND_SIG on Bottom Layer "Top Layer-No Net 1" (solid, remove dead copper, pour order 8): 35.15,24.67 35.12,24.64 35.12,3.14 57.5,3.14 57.57,3.07 57.55,3.09 57.55,22.13 57.55,28.94 57.44,29.05 57.4,29.09 38.18,29.09 38.18,27.71 35.13,24.66
GND_SIG on Bottom Layer "Top Layer-No Net 1" (solid, remove dead copper, pour order 10): 61.46,51.43 61.46,71.21 121.81,71.21 121.94,71.08 121.94,33.13 61.34,33.13 61.47,33.26 61.47,51.43
DGND on Bottom Layer "Top Layer-No Net 1" (solid, remove dead copper, pour order 13): -0.17,102.13 -0.32,101.98 -0.32,-0.17 248.22,-0.17 248.34,-0.29 246.75,1.3 246.75,98.97 246.75,102.15 246.66,102.24 -0.62,102.24

## Keep-outs
Keep-Out Layer:
  circle w0.3: c29,89 r2
  circle w0.3: c218,89 r2
  circle w0.3: c218,14 r2
  circle w0.3: c29,14 r2
  circle w0.254: c181.138,73.054 r1.7
  circle w0.254: c33.138,73.054 r1.7
  circle w0.254: c33.138,29.054 r1.7
  circle w0.254: c181.138,29.054 r1.7
  lines w0.254: 0,21.02 ccw(c1.27,21.02) 1.27,19.75 4.5,19.75 cw(c4.5,14.25) 10,14.25 10,1.27 ccw(c11.27,1.27) 11.27,0 12.54,0 235.857,0 ccw(c235.857,1.143) 237,1.143 237,14.243 cw(c242.5,14.243) 242.5,19.743 245.73,19.743 ccw(c245.73,21.013) 247,21.013 247,22.371 247,80.156 247,80.98 ccw(c245.73,80.98) 245.73,82.25 242.5,82.25 cw(c242.5,87.75) 237,87.75 237,100.73 ccw(c235.73,100.73) 235.73,102 234.46,102 11.143,102 ccw(c11.143,100.857) 10,100.857 10,87.757 cw(c4.5,87.757) 4.5,82.257 1.27,82.257 ccw(c1.27,80.987) 0,80.987 0,79.629 0,21.844 0,21.02

## Silkscreen, mask and mechanical layers (free items; w line width, h text height)
Top Overlay:
  circle w0.254: c29,89 r4
  circle w0.254: c29,14 r4
  circle w0.254: c218,89 r4
  circle w0.254: c218,14 r4
  circle w0.254: c33.138,29.054 r4
  circle w0.254: c181.138,73.054 r4
  circle w0.254: c181.138,29.054 r4
  circle w0.254: c33.138,73.054 r4
  text "JS-IO-1.0" at 193.66,35.7 h1.52
  text "2014-12-16" at 192.82,32.66 h1.52
Bottom Overlay:
  text "+24V" at 65.71,98.91 h1.52
  text "V1" at 71.68,98.91 h1.52
  text "AGND" at 80.81,98.91 h1.52
  text "P15" at 87.86,98.91 h1.52
  text "P14" at 95.32,98.91 h1.52
  text "P13" at 103.07,98.91 h1.52
  text "P12" at 110.64,98.91 h1.52
  text "P11" at 118.08,98.91 h1.52
  text "P10" at 125.78,98.91 h1.52
  text "P9" at 132.7,98.91 h1.52
  text "P8" at 140.43,98.91 h1.52
  text "COM" at 148.91,98.91 h1.52
  text "P6" at 155.58,98.91 h1.52
  text "P4" at 163.16,98.91 h1.52
  text "P2" at 170.94,98.91 h1.52
  text "P0" at 178.53,98.91 h1.52
  text "DGND" at 65.64,88.04 h1.52
  text "V2" at 71.89,88.04 h1.52
  text "AGND" at 80.86,88.04 h1.52
  text "P15" at 87.87,88.04 h1.52
  text "P14" at 95.38,88.04 h1.52
  text "P13" at 103.14,88.04 h1.52
  text "P12" at 110.48,88.04 h1.52
  text "P11" at 118.01,88.04 h1.52
  text "P10" at 125.81,88.04 h1.52
  text "P9" at 132.55,88.04 h1.52
  text "P8" at 140.52,88.04 h1.52
  text "DGND" at 149.8,88.04 h1.52
  text "P7" at 155.79,88.04 h1.52
  text "P5" at 163.34,88.04 h1.52
  text "P3" at 171,88.04 h1.52
  text "P1" at 178.3,88.04 h1.52
  text "P1" at 63.9,12.67 h1.52
  text "P15" at 117.9,12.67 h1.52
  text "P31" at 178.22,12.67 h1.52
  text "P0" at 64.04,1.87 h1.52
  text "P14" at 118.03,1.87 h1.52
  text "P30" at 179.14,1.87 h1.52

## Dimensions
11.143,102 to 12.54,0 on Top Overlay
0,79.629 to 247,80.156 on Top Overlay

## Text inside footprints (layer, text, board x,y; h text height)
J1: Top Overlay "6" at 202.735,4.595 h1 r180; Top Overlay "9" at 194.425,4.595 h1 r180; Top Overlay "5" at 189.204,12.53 h1; Top Overlay "1" at 205.394,12.82 h1
L2: Top Overlay "GS" at 39.11,49.78 h1 r90
L4: Top Overlay "GS" at 17.12,33.95 h1 r90
P1: Bottom Overlay "1" at 118.618,25.15 h1; Bottom Overlay "2" at 118.618,27.69 h1
P2: Bottom Overlay "1" at 118.618,73.406 h1; Bottom Overlay "2" at 118.618,75.946 h1